# Altium PCB STM32F302VC_EVM.PcbDoc (part 8 of 19)
Units mil, origin at the board's own origin, x right, y up, seen from the top; angles counter-clockwise.
Board outline 3937.01 x 3937.01 mil, 2 copper layers (Top Layer, Bottom Layer); 117 components, 166 nets, 602 pads, 373 vias.
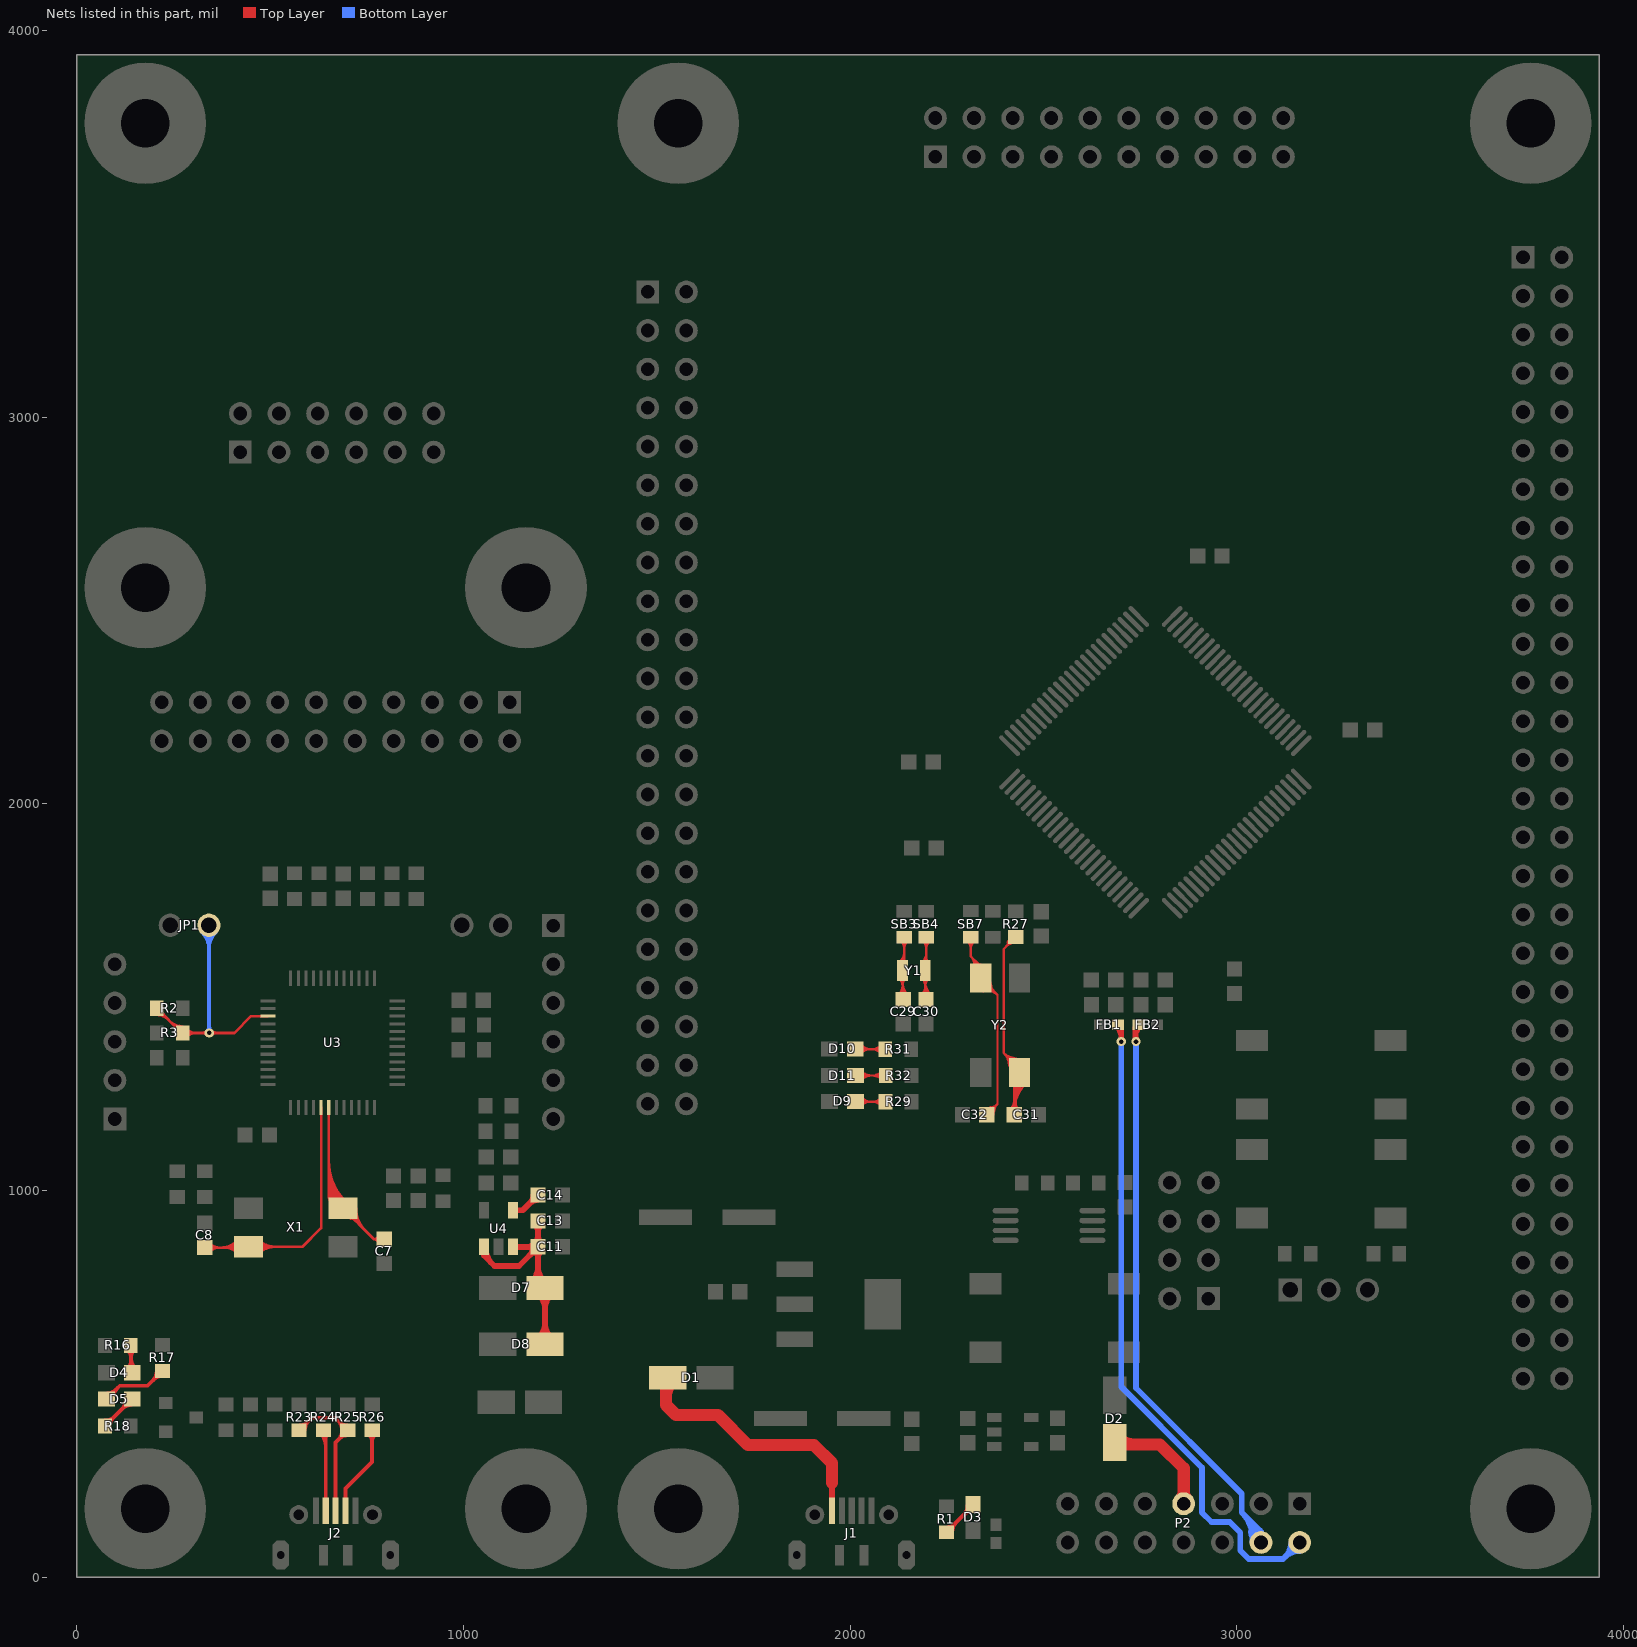
[diagram p8: the nets of this part, all layers, seen from the top]

## Via types
v1: diameter 23.62, hole 11.81, Top Layer to Bottom Layer, tented both sides, 372 vias
v2: diameter 50, hole 28, Top Layer to Bottom Layer, tented both sides, 1 vias

## Nets (pads, with @x,y where several pads share a name; then routed paths per layer and width w, separated by ;. In a path a pad name is that pad's centre, name@x,y a point inside that pad or via, vN(x,y) a via of type N, cw(c..) or ccw(c..) an arc to the next point about the centre after c; other vN are vias at no path point) (continued)
NetC7_1: C7.1 U3.6 X1.3 | length 4002.4
  Top Layer w7: U3.6@651.57,1214.57 651.57,982.28 679.33,954.53 X1.3@687.99,954.53 768.5,874.02 ; C7.1@795.28,874.02 768.5,874.02 ; 651.57,992.27 ccw(c715.89,992.27) X1.3@670.41,946.79 ; 651.57,992.27 ccw(c715.89,992.27) X1.3@670.41,946.79 ; 651.57,992.27 ccw(c715.89,992.27) X1.3@670.41,946.79 ; 651.57,1009.17 ccw(c732.79,1009.17) X1.3@675.36,951.74 ; 651.57,1009.17 ccw(c732.79,1009.17) X1.3@675.36,951.74 ; 651.57,1009.17 ccw(c732.79,1009.17) X1.3@675.36,951.74 ; 651.57,1026.07 ccw(c749.69,1026.07) X1.3@680.31,956.69 ; 651.57,1026.07 ccw(c749.69,1026.07) X1.3@680.31,956.69 ; 651.57,1026.07 ccw(c749.69,1026.07) X1.3@680.31,956.69 ; 651.57,1042.97 ccw(c766.59,1042.97) X1.3@685.26,961.64 ; 651.57,1042.97 ccw(c766.59,1042.97) X1.3@685.26,961.64 ; 651.57,1042.97 ccw(c766.59,1042.97) X1.3@685.26,961.64 ; 651.57,1059.87 ccw(c783.49,1059.87) X1.3@690.21,966.59 ; 651.57,1059.87 ccw(c783.49,1059.87) X1.3@690.21,966.59 ; 651.57,1059.87 ccw(c783.49,1059.87) X1.3@690.21,966.59 ; 651.57,1076.77 ccw(c800.39,1076.77) X1.3@695.16,971.54 ; 651.57,1076.77 ccw(c800.39,1076.77) X1.3@695.16,971.54 ; 651.57,1076.77 ccw(c800.39,1076.77) X1.3@695.16,971.54 ; 651.58,982.28 cw(c638.83,969.53) X1.3@655.67,963.11 ; 651.58,982.28 ccw(c665.24,995.95) X1.3@670.99,977.5 ; 651.58,982.28 ccw(c665.24,995.95) X1.3@670.99,977.5 ; 651.58,982.28 cw(c638.83,969.53) X1.3@655.67,963.11 ; 651.58,982.28 ccw(c665.24,995.95) X1.3@670.99,977.5 ; 651.58,982.28 cw(c638.83,969.53) X1.3@655.67,963.11 ; 653.24,990.05 cw(c625.38,973.96) X1.3@655.57,962.84 ; 653.24,990.05 ccw(c673.5,1001.75) X1.3@675.79,978.47 ; 653.24,990.05 cw(c625.38,973.96) X1.3@655.57,962.84 ; 653.24,990.05 ccw(c673.5,1001.75) X1.3@675.79,978.47 ; 653.24,990.05 ccw(c673.5,1001.75) X1.3@675.79,978.47 ; 653.24,990.05 cw(c625.38,973.96) X1.3@655.57,962.84 ; 655.77,999.2 cw(c625.04,981.45) X1.3@656.69,965.41 ; 655.77,999.2 ccw(c695.11,1021.91) X1.3@684.02,977.86 ; 655.77,999.2 cw(c625.04,981.45) X1.3@656.69,965.41 ; 655.77,999.2 ccw(c695.11,1021.91) X1.3@684.02,977.86 ; 655.77,999.2 ccw(c695.11,1021.91) X1.3@684.02,977.86 ; 655.77,999.2 cw(c625.04,981.45) X1.3@656.69,965.41 ; X1.3@658.67,980.65 ccw(c674.67,989.88) X1.3@676.48,971.5 ; X1.3@658.67,980.65 ccw(c674.67,989.88) X1.3@676.48,971.5 ; X1.3@658.67,980.65 ccw(c674.67,989.88) X1.3@676.48,971.5 ; X1.3@659.21,974.64 cw(c649.88,965.31) X1.3@662.21,960.61 ; X1.3@659.21,974.64 cw(c649.88,965.31) X1.3@662.21,960.61 ; X1.3@659.21,974.64 cw(c649.88,965.31) X1.3@662.21,960.61 ; X1.3@659.98,970.3 ccw(c642.93,985.11) 661.83,997.47 ; X1.3@659.98,970.3 ccw(c642.93,985.11) 661.83,997.47 ; X1.3@659.98,970.3 ccw(c642.93,985.11) 661.83,997.47 ; X1.3@660.71,977.12 cw(c643.62,967.24) X1.3@662.14,960.42 ; X1.3@660.71,977.12 cw(c643.62,967.24) X1.3@662.14,960.42 ; X1.3@660.71,977.12 cw(c643.62,967.24) X1.3@662.14,960.42 ; 662.23,988 cw(c638.8,974.48) X1.3@662.93,962.24 ; 662.23,988 cw(c638.8,974.48) X1.3@662.93,962.24 ; 662.23,988 cw(c638.8,974.48) X1.3@662.93,962.24 ; 664.04,984.87 ccw(c689.48,999.56) X1.3@682.31,971.07 ; 664.04,984.87 ccw(c689.48,999.56) X1.3@682.31,971.07 ; 664.04,984.87 ccw(c689.48,999.56) X1.3@682.31,971.07 ; X1.3@665.27,965.71 ccw(c650.21,978.8) 666.9,989.72 ; X1.3@665.27,965.71 ccw(c650.21,978.8) 666.9,989.72 ; X1.3@665.27,965.71 ccw(c650.21,978.8) 666.9,989.72 ; 667.61,988.64 ccw(c688.09,1002.03) X1.3@683.08,978.08 ; 667.61,988.64 ccw(c688.09,1002.03) X1.3@683.08,978.08 ; 667.61,988.64 ccw(c688.09,1002.03) X1.3@683.08,978.08 ; X1.3@670.55,961.12 ccw(c657.48,972.48) X1.3@671.97,981.96 ; X1.3@670.55,961.12 ccw(c657.48,972.48) X1.3@671.97,981.96 ; X1.3@670.55,961.12 ccw(c657.48,972.48) X1.3@671.97,981.96 ; X1.3@686.9,954.09 ccw(c715.31,955.22) X1.3@707.95,927.76 ; X1.3@686.9,954.09 ccw(c715.31,955.22) X1.3@707.95,927.76 ; X1.3@686.9,954.09 ccw(c715.31,955.22) X1.3@707.95,927.76 ; X1.3@693.9,954.37 ccw(c725.26,955.62) 717.14,925.3 ; X1.3@693.9,954.37 ccw(c725.26,955.62) 717.14,925.3 ; X1.3@693.9,954.37 ccw(c725.26,955.62) 717.14,925.3 ; X1.3@697.18,951.54 cw(c690.13,919.25) X1.3@722.05,927.8 ; X1.3@697.18,951.54 cw(c690.13,919.25) X1.3@722.05,927.8 ; X1.3@697.18,951.54 cw(c690.13,919.25) X1.3@722.05,927.8 ; X1.3@697.83,930.47 cw(c697.83,896.15) 722.1,920.42 ; X1.3@697.83,930.47 cw(c697.83,896.15) 722.1,920.42 ; X1.3@697.83,930.47 cw(c697.83,896.15) 722.1,920.42 ; X1.3@707.89,954.53 ccw(c755.94,954.53) 721.97,920.55 ; X1.3@707.89,954.53 ccw(c755.94,954.53) 721.97,920.55 ; X1.3@707.89,954.53 ccw(c755.94,954.53) 721.97,920.55 ; X1.3@714.89,954.53 ccw(c779.84,954.53) 733.92,908.6 ; X1.3@714.89,954.53 ccw(c779.84,954.53) 733.92,908.6 ; X1.3@714.89,954.53 ccw(c779.84,954.53) 733.92,908.6 ; X1.3@721.89,954.53 ccw(c803.74,954.53) 745.87,896.65 ; X1.3@721.89,954.53 ccw(c803.74,954.53) 745.87,896.65 ; X1.3@721.89,954.53 ccw(c803.74,954.53) 745.87,896.65 ; 768.51,874.02 cw(c768.51,859.97) C7.1@780.94,866.5 ; 768.51,874.02 ccw(c768.51,888.06) C7.1@780.94,881.54 ; 768.51,874.02 ccw(c768.51,888.06) C7.1@780.94,881.54 ; 768.51,874.02 cw(c768.51,859.97) C7.1@780.94,866.5 ; 768.51,874.02 ccw(c768.51,888.06) C7.1@780.94,881.54 ; 768.51,874.02 cw(c768.51,859.97) C7.1@780.94,866.5
NetC8_1: C8.1 U3.5 X1.1 | length 1932.8
  Top Layer w7: C8.1@330.71,852.36 441.73,852.36 X1.1@443.9,854.53 583.86,854.53 631.89,902.56 U3.5@631.89,1214.57 ; C8.1@337.2,845.87 cw(c352.88,830.19) 352.88,852.36 ; C8.1@337.2,845.87 cw(c352.88,830.19) 352.88,852.36 ; C8.1@337.2,845.87 cw(c352.88,830.19) 352.88,852.36 ; C8.1@337.2,858.86 ccw(c352.88,874.54) 352.88,852.36 ; C8.1@337.2,858.86 ccw(c352.88,874.54) 352.88,852.36 ; C8.1@337.2,858.86 ccw(c352.88,874.54) 352.88,852.36 ; C8.1@342.15,840.92 cw(c369.78,813.29) 369.78,852.36 ; C8.1@342.15,840.92 cw(c369.78,813.29) 369.78,852.36 ; C8.1@342.15,840.92 cw(c369.78,813.29) 369.78,852.36 ; C8.1@342.15,863.81 ccw(c369.78,891.44) 369.78,852.36 ; C8.1@342.15,863.81 ccw(c369.78,891.44) 369.78,852.36 ; C8.1@342.15,863.81 ccw(c369.78,891.44) 369.78,852.36 ; 370.74,852.36 ccw(c370.74,917.84) X1.1@417.04,871.54 ; 370.74,852.36 ccw(c370.74,917.84) X1.1@417.04,871.54 ; 370.74,852.36 ccw(c370.74,917.84) X1.1@417.04,871.54 ; 381.2,852.36 cw(c381.2,801.67) X1.1@417.04,837.52 ; 381.2,852.36 cw(c381.2,801.67) X1.1@417.04,837.52 ; 381.2,852.36 cw(c381.2,801.67) X1.1@417.04,837.52 ; 387.64,852.36 ccw(c387.64,900.94) X1.1@421.99,866.59 ; 387.64,852.36 ccw(c387.64,900.94) X1.1@421.99,866.59 ; 387.64,852.36 ccw(c387.64,900.94) X1.1@421.99,866.59 ; 398.1,852.36 cw(c398.1,818.57) X1.1@421.99,842.47 ; 398.1,852.36 cw(c398.1,818.57) X1.1@421.99,842.47 ; 398.1,852.36 cw(c398.1,818.57) X1.1@421.99,842.47 ; 404.54,852.36 ccw(c404.54,884.04) X1.1@426.94,861.64 ; 404.54,852.36 ccw(c404.54,884.04) X1.1@426.94,861.64 ; 404.54,852.36 ccw(c404.54,884.04) X1.1@426.94,861.64 ; X1.1@465.8,842.47 cw(c494.92,813.34) 494.92,854.53 ; X1.1@465.8,842.47 cw(c494.92,813.34) 494.92,854.53 ; X1.1@465.8,842.47 cw(c494.92,813.34) 494.92,854.53 ; X1.1@465.8,866.59 ccw(c494.92,895.71) 494.92,854.53 ; X1.1@465.8,866.59 ccw(c494.92,895.71) 494.92,854.53 ; X1.1@465.8,866.59 ccw(c494.92,895.71) 494.92,854.53 ; X1.1@470.75,837.52 cw(c511.82,796.44) 511.82,854.53 ; X1.1@470.75,837.52 cw(c511.82,796.44) 511.82,854.53 ; X1.1@470.75,837.52 cw(c511.82,796.44) 511.82,854.53 ; X1.1@470.75,871.54 ccw(c511.82,912.61) 511.82,854.53 ; X1.1@470.75,871.54 ccw(c511.82,912.61) 511.82,854.53 ; X1.1@470.75,871.54 ccw(c511.82,912.61) 511.82,854.53
NetC11_2: C11.2 C13.2 D7.1 D8.1 U4.1 U4.3 | length 2257.7
  Top Layer w15: U4.1@1053.15,854.33 1053.15,831.81 1079.84,805.12 1143.7,805.12 C11.2@1192.91,854.33 ; U4.1@1058.19,843.85 ccw(c1071.36,839.6) 1061.57,829.82 ; U4.3@1127.95,854.33 C11.2@1192.91,854.33 ; C13.2@1192.91,921.26 C11.2@1192.91,854.33 ; D8.1@1210.63,602.36 D7.1@1210.63,748.03 1192.91,765.75 C11.2@1192.91,854.33 ; U4.1@1050.5,840.89 cw(c1035.38,814.69) 1064.59,822.52 ; U4.1@1050.5,840.89 cw(c1035.38,814.69) 1064.59,822.52 ; U4.1@1050.5,840.89 cw(c1035.38,814.69) 1064.59,822.52 ; U4.1@1058.44,845.47 ccw(c1104.21,845.47) 1071.85,813.11 ; U4.1@1058.44,845.47 ccw(c1104.21,845.47) 1071.85,813.11 ; U4.1@1058.44,845.47 ccw(c1104.21,845.47) 1071.85,813.11 ; 1163.5,854.33 cw(c1163.5,824.91) C11.2@1184.3,845.71 ; 1163.5,854.33 ccw(c1163.5,883.75) C11.2@1184.3,862.95 ; 1163.5,854.33 ccw(c1163.5,883.75) C11.2@1184.3,862.95 ; 1163.5,854.33 cw(c1163.5,824.91) C11.2@1184.3,845.71 ; 1163.5,854.33 ccw(c1163.5,883.75) C11.2@1184.3,862.95 ; 1163.5,854.33 cw(c1163.5,824.91) C11.2@1184.3,845.71 ; 1172.11,833.53 cw(c1192.91,812.73) C11.2@1192.91,842.15 ; 1172.11,833.53 ccw(c1151.31,854.33) C11.2@1180.73,854.33 ; 1172.11,833.53 ccw(c1151.31,854.33) C11.2@1180.73,854.33 ; 1172.11,833.53 cw(c1192.91,812.73) C11.2@1192.91,842.15 ; 1172.11,833.53 ccw(c1151.31,854.33) C11.2@1180.73,854.33 ; 1172.11,833.53 cw(c1192.91,812.73) C11.2@1192.91,842.15 ; D7.1@1176.64,764.3 ccw(c1137.36,803.59) 1192.91,803.59 ; D7.1@1176.64,764.3 ccw(c1137.36,803.59) 1192.91,803.59 ; D7.1@1176.64,764.3 ccw(c1137.36,803.59) 1192.91,803.59 ; C11.2@1184.3,845.71 cw(c1163.5,824.91) 1192.91,824.91 ; C11.2@1184.3,845.71 cw(c1163.5,824.91) 1192.91,824.91 ; C11.2@1184.3,845.71 cw(c1163.5,824.91) 1192.91,824.91 ; C11.2@1184.3,862.95 ccw(c1163.5,883.75) 1192.91,883.75 ; C11.2@1184.3,862.95 ccw(c1163.5,883.75) 1192.91,883.75 ; C11.2@1184.3,862.95 ccw(c1163.5,883.75) 1192.91,883.75 ; C13.2@1184.3,912.64 cw(c1163.5,891.84) 1192.91,891.84 ; C13.2@1184.3,912.64 cw(c1163.5,891.84) 1192.91,891.84 ; C13.2@1184.3,912.64 cw(c1163.5,891.84) 1192.91,891.84 ; 1192.91,803.59 ccw(c1248.47,803.59) D7.1@1209.19,764.3 ; 1192.91,803.59 ccw(c1248.47,803.59) D7.1@1209.19,764.3 ; 1192.91,803.59 ccw(c1248.47,803.59) D7.1@1209.19,764.3 ; 1192.91,824.91 cw(c1222.33,824.91) C11.2@1201.53,845.71 ; 1192.91,824.91 cw(c1222.33,824.91) C11.2@1201.53,845.71 ; 1192.91,824.91 cw(c1222.33,824.91) C11.2@1201.53,845.71 ; 1192.91,883.75 ccw(c1222.33,883.75) C11.2@1201.53,862.95 ; 1192.91,883.75 ccw(c1222.33,883.75) C11.2@1201.53,862.95 ; 1192.91,883.75 ccw(c1222.33,883.75) C11.2@1201.53,862.95 ; 1192.91,891.84 cw(c1222.33,891.84) C13.2@1201.53,912.64 ; 1192.91,891.84 cw(c1222.33,891.84) C13.2@1201.53,912.64 ; 1192.91,891.84 cw(c1222.33,891.84) C13.2@1201.53,912.64 ; D8.1@1194.36,618.63 ccw(c1155.07,657.92) 1210.63,657.92 ; D8.1@1194.36,618.63 ccw(c1155.07,657.92) 1210.63,657.92 ; D8.1@1194.36,618.63 ccw(c1155.07,657.92) 1210.63,657.92 ; D7.1@1194.36,731.76 cw(c1155.07,692.48) 1210.63,692.48 ; D7.1@1194.36,731.76 cw(c1155.07,692.48) 1210.63,692.48 ; D7.1@1194.36,731.76 cw(c1155.07,692.48) 1210.63,692.48 ; 1210.63,657.92 ccw(c1266.19,657.92) D8.1@1226.9,618.63 ; 1210.63,657.92 ccw(c1266.19,657.92) D8.1@1226.9,618.63 ; 1210.63,657.92 ccw(c1266.19,657.92) D8.1@1226.9,618.63 ; 1210.63,692.48 cw(c1266.19,692.48) D7.1@1226.9,731.76 ; 1210.63,692.48 cw(c1266.19,692.48) D7.1@1226.9,731.76 ; 1210.63,692.48 cw(c1266.19,692.48) D7.1@1226.9,731.76
NetC14_2: C14.2 U4.4 | length 219.9
  Top Layer w15: U4.4@1127.95,948.82 1153.54,948.82 C14.2@1192.91,988.19 ; 1172.11,967.39 cw(c1192.91,946.59) C14.2@1192.91,976 ; 1172.11,967.39 ccw(c1151.31,988.19) C14.2@1180.73,988.19 ; 1172.11,967.39 ccw(c1151.31,988.19) C14.2@1180.73,988.19 ; 1172.11,967.39 cw(c1192.91,946.59) C14.2@1192.91,976 ; 1172.11,967.39 ccw(c1151.31,988.19) C14.2@1180.73,988.19 ; 1172.11,967.39 cw(c1192.91,946.59) C14.2@1192.91,976
NetC29_2: C29.2 SB3.1 Y1.2 | length 1011.8
  Top Layer w6: C29.2@2137.17,1494.09 2135.2,1496.06 Y1.2@2135.2,1568.9 2139.76,1573.46 SB3.1@2139.76,1655.09 ; C29.2@2125.37,1505.89 ccw(c2101.64,1529.62) 2135.2,1529.62 ; C29.2@2125.37,1505.89 ccw(c2101.64,1529.62) 2135.2,1529.62 ; C29.2@2125.37,1505.89 ccw(c2101.64,1529.62) 2135.2,1529.62 ; Y1.2@2127.57,1547.5 cw(c2109.17,1529.09) 2135.2,1529.09 ; Y1.2@2127.57,1547.5 cw(c2109.17,1529.09) 2135.2,1529.09 ; Y1.2@2127.57,1547.5 cw(c2109.17,1529.09) 2135.2,1529.09 ; Y1.2@2127.57,1590.3 ccw(c2098.15,1619.73) 2139.76,1619.73 ; Y1.2@2127.57,1590.3 ccw(c2098.15,1619.73) 2139.76,1619.73 ; Y1.2@2127.57,1590.3 ccw(c2098.15,1619.73) 2139.76,1619.73 ; C29.2@2129.61,1501.65 ccw(c2116.12,1515.14) 2135.2,1515.14 ; C29.2@2129.61,1501.65 ccw(c2116.12,1515.14) 2135.2,1515.14 ; C29.2@2129.61,1501.65 ccw(c2116.12,1515.14) 2135.2,1515.14 ; SB3.1@2130.57,1645.9 cw(c2108.38,1623.7) 2139.76,1623.7 ; SB3.1@2130.57,1645.9 cw(c2108.38,1623.7) 2139.76,1623.7 ; SB3.1@2130.57,1645.9 cw(c2108.38,1623.7) 2139.76,1623.7 ; Y1.2@2131.82,1586.06 ccw(c2112.63,1605.24) 2139.76,1605.24 ; Y1.2@2131.82,1586.06 ccw(c2112.63,1605.24) 2139.76,1605.24 ; Y1.2@2131.82,1586.06 ccw(c2112.63,1605.24) 2139.76,1605.24 ; SB3.1@2134.81,1650.14 cw(c2122.86,1638.19) 2139.76,1638.19 ; SB3.1@2134.81,1650.14 cw(c2122.86,1638.19) 2139.76,1638.19 ; SB3.1@2134.81,1650.14 cw(c2122.86,1638.19) 2139.76,1638.19 ; 2135.2,1524.64 ccw(c2167.71,1524.64) C29.2@2144.72,1501.65 ; 2135.2,1524.64 ccw(c2167.71,1524.64) C29.2@2144.72,1501.65 ; 2135.2,1524.64 ccw(c2167.71,1524.64) C29.2@2144.72,1501.65 ; 2135.2,1529.09 cw(c2161.22,1529.09) Y1.2@2142.82,1547.5 ; 2135.2,1529.09 cw(c2161.22,1529.09) Y1.2@2142.82,1547.5 ; 2135.2,1529.09 cw(c2161.22,1529.09) Y1.2@2142.82,1547.5 ; 2135.2,1539.13 ccw(c2182.2,1539.13) C29.2@2148.96,1505.89 ; 2135.2,1539.13 ccw(c2182.2,1539.13) C29.2@2148.96,1505.89 ; 2135.2,1539.13 ccw(c2182.2,1539.13) C29.2@2148.96,1505.89 ; 2139.76,1597.68 ccw(c2150.2,1597.68) Y1.2@2142.82,1590.3 ; 2139.76,1597.68 ccw(c2150.2,1597.68) Y1.2@2142.82,1590.3 ; 2139.76,1597.68 ccw(c2150.2,1597.68) Y1.2@2142.82,1590.3 ; 2139.76,1623.7 cw(c2171.15,1623.7) SB3.1@2148.96,1645.9 ; 2139.76,1623.7 cw(c2171.15,1623.7) SB3.1@2148.96,1645.9 ; 2139.76,1623.7 cw(c2171.15,1623.7) SB3.1@2148.96,1645.9 ; 2139.76,1638.19 cw(c2156.66,1638.19) SB3.1@2144.71,1650.14 ; 2139.76,1638.19 cw(c2156.66,1638.19) SB3.1@2144.71,1650.14 ; 2139.76,1638.19 cw(c2156.66,1638.19) SB3.1@2144.71,1650.14
NetC30_2: C30.2 SB4.1 Y1.1 | length 995.2
  Top Layer w6: C30.2@2196.22,1494.09 2194.25,1496.06 Y1.1@2194.25,1568.9 2196.85,1571.5 SB4.1@2196.85,1655.09 ; C30.2@2184.42,1505.89 ccw(c2160.69,1529.62) 2194.25,1529.62 ; C30.2@2184.42,1505.89 ccw(c2160.69,1529.62) 2194.25,1529.62 ; C30.2@2184.42,1505.89 ccw(c2160.69,1529.62) 2194.25,1529.62 ; Y1.1@2186.63,1547.5 cw(c2168.23,1529.09) 2194.25,1529.09 ; Y1.1@2186.63,1547.5 cw(c2168.23,1529.09) 2194.25,1529.09 ; Y1.1@2186.63,1547.5 cw(c2168.23,1529.09) 2194.25,1529.09 ; Y1.1@2186.63,1590.3 ccw(c2161.96,1614.97) 2196.85,1614.97 ; Y1.1@2186.63,1590.3 ccw(c2161.96,1614.97) 2196.85,1614.97 ; Y1.1@2186.63,1590.3 ccw(c2161.96,1614.97) 2196.85,1614.97 ; SB4.1@2187.66,1645.9 cw(c2165.47,1623.7) 2196.85,1623.7 ; SB4.1@2187.66,1645.9 cw(c2165.47,1623.7) 2196.85,1623.7 ; SB4.1@2187.66,1645.9 cw(c2165.47,1623.7) 2196.85,1623.7 ; C30.2@2188.66,1501.65 ccw(c2175.18,1515.14) 2194.25,1515.14 ; C30.2@2188.66,1501.65 ccw(c2175.18,1515.14) 2194.25,1515.14 ; C30.2@2188.66,1501.65 ccw(c2175.18,1515.14) 2194.25,1515.14 ; Y1.1@2190.87,1586.06 ccw(c2176.44,1600.49) 2196.85,1600.49 ; Y1.1@2190.87,1586.06 ccw(c2176.44,1600.49) 2196.85,1600.49 ; Y1.1@2190.87,1586.06 ccw(c2176.44,1600.49) 2196.85,1600.49 ; SB4.1@2191.9,1650.14 cw(c2179.95,1638.19) 2196.85,1638.19 ; SB4.1@2191.9,1650.14 cw(c2179.95,1638.19) 2196.85,1638.19 ; SB4.1@2191.9,1650.14 cw(c2179.95,1638.19) 2196.85,1638.19 ; 2194.25,1524.64 ccw(c2226.77,1524.64) C30.2@2203.78,1501.65 ; 2194.25,1524.64 ccw(c2226.77,1524.64) C30.2@2203.78,1501.65 ; 2194.25,1524.64 ccw(c2226.77,1524.64) C30.2@2203.78,1501.65 ; 2194.25,1529.09 cw(c2220.28,1529.09) Y1.1@2201.87,1547.5 ; 2194.25,1529.09 cw(c2220.28,1529.09) Y1.1@2201.87,1547.5 ; 2194.25,1529.09 cw(c2220.28,1529.09) Y1.1@2201.87,1547.5 ; 2194.25,1539.13 ccw(c2241.25,1539.13) C30.2@2208.02,1505.89 ; 2194.25,1539.13 ccw(c2241.25,1539.13) C30.2@2208.02,1505.89 ; 2194.25,1539.13 ccw(c2241.25,1539.13) C30.2@2208.02,1505.89 ; 2196.85,1602.43 ccw(c2214,1602.43) Y1.1@2201.87,1590.3 ; 2196.85,1602.43 ccw(c2214,1602.43) Y1.1@2201.87,1590.3 ; 2196.85,1602.43 ccw(c2214,1602.43) Y1.1@2201.87,1590.3 ; 2196.85,1623.7 cw(c2228.23,1623.7) SB4.1@2206.04,1645.9 ; 2196.85,1623.7 cw(c2228.23,1623.7) SB4.1@2206.04,1645.9 ; 2196.85,1623.7 cw(c2228.23,1623.7) SB4.1@2206.04,1645.9 ; 2196.85,1638.19 cw(c2213.75,1638.19) SB4.1@2201.8,1650.14 ; 2196.85,1638.19 cw(c2213.75,1638.19) SB4.1@2201.8,1650.14 ; 2196.85,1638.19 cw(c2213.75,1638.19) SB4.1@2201.8,1650.14
NetC31_2: C31.2 R27.1 Y2.1 | length 4389.7
  Top Layer w6: Y2.1@2411.38,1338.3 ccw(c2441.85,1346.76) Y2.1@2437.87,1315.39 ; Y2.1@2413.79,1329.6 ccw(c2440.62,1337.06) Y2.1@2437.11,1309.44 ; Y2.1@2414.29,1321.96 ccw(c2393.15,1328.37) 2409.8,1342.89 ccw(c2423.2,1354.57) Y2.1@2429.33,1337.89 ; Y2.1@2414.34,1322.11 ccw(c2393.74,1328.5) 2410,1342.67 ccw(c2423.07,1354.07) Y2.1@2429.17,1337.83 ; C31.2@2424.21,1195.87 2424.21,1291.41 Y2.1@2437.8,1304.99 2437.8,1315.3 2396.84,1356.25 ; R27.1@2428.15,1655.51 2396.84,1624.2 2396.84,1356.25 ; 2396.84,1356.25 cw(c2357.22,1316.62) Y2.1@2413.24,1315.38 ; 2396.84,1356.25 ccw(c2437.53,1396.93) Y2.1@2437.72,1339.39 ; 2396.84,1356.25 ccw(c2437.53,1396.93) Y2.1@2437.72,1339.39 ; 2396.84,1356.25 cw(c2357.22,1316.62) Y2.1@2413.24,1315.38 ; 2396.84,1356.25 ccw(c2437.53,1396.93) Y2.1@2437.72,1339.39 ; 2396.84,1356.25 cw(c2357.22,1316.62) Y2.1@2413.24,1315.38 ; 2399.67,1627.03 ccw(c2371.18,1655.51) R27.1@2411.46,1655.51 ; 2399.67,1627.03 ccw(c2371.18,1655.51) R27.1@2411.46,1655.51 ; 2399.67,1627.03 ccw(c2371.18,1655.51) R27.1@2411.46,1655.51 ; 2404.42,1631.78 cw(c2426.18,1610.02) R27.1@2426.18,1640.8 ; 2404.42,1631.78 cw(c2426.18,1610.02) R27.1@2426.18,1640.8 ; 2404.42,1631.78 cw(c2426.18,1610.02) R27.1@2426.18,1640.8 ; 2406.58,1346.54 cw(c2383.33,1325.98) Y2.1@2413.73,1319.76 ; 2406.58,1346.54 ccw(c2425.71,1363.45) Y2.1@2431.87,1338.67 ; 2406.58,1346.54 cw(c2383.33,1325.98) Y2.1@2413.73,1319.76 ; 2406.58,1346.54 ccw(c2425.71,1363.45) Y2.1@2431.87,1338.67 ; 2406.58,1346.54 ccw(c2425.71,1363.45) Y2.1@2431.87,1338.67 ; 2406.58,1346.54 cw(c2383.33,1325.98) Y2.1@2413.73,1319.76 ; 2406.77,1346.32 cw(c2376.65,1316.19) Y2.1@2419.24,1315.25 ; 2406.77,1346.32 cw(c2376.65,1316.19) Y2.1@2419.24,1315.25 ; 2406.77,1346.32 cw(c2376.65,1316.19) Y2.1@2419.24,1315.25 ; 2407.04,1346.05 ccw(c2437.6,1376.6) Y2.1@2437.74,1333.39 ; 2407.04,1346.05 ccw(c2437.6,1376.6) Y2.1@2437.74,1333.39 ; 2407.04,1346.05 ccw(c2437.6,1376.6) Y2.1@2437.74,1333.39 ; 2407.47,1339.01 ccw(c2446.64,1348.57) Y2.1@2436.42,1309.57 ; 2407.47,1339.01 ccw(c2446.64,1348.57) Y2.1@2436.42,1309.57 ; 2407.47,1339.01 ccw(c2446.64,1348.57) Y2.1@2436.42,1309.57 ; 2407.63,1641.21 cw(c2431.4,1634.84) R27.1@2425.38,1658.7 ; 2407.63,1641.21 cw(c2431.4,1634.84) R27.1@2425.38,1658.7 ; 2407.63,1641.21 cw(c2431.4,1634.84) R27.1@2425.38,1658.7 ; 2409.08,1344.79 ccw(c2428.84,1354.33) Y2.1@2433.69,1332.93 ; 2409.08,1344.79 ccw(c2428.84,1354.33) Y2.1@2433.69,1332.93 ; 2409.08,1344.79 ccw(c2428.84,1354.33) Y2.1@2433.69,1332.93 ; 2409.86,1329.22 ccw(c2443.74,1337.5) Y2.1@2434.89,1303.77 ; 2409.86,1329.22 ccw(c2443.74,1337.5) Y2.1@2434.89,1303.77 ; 2409.86,1329.22 ccw(c2443.74,1337.5) Y2.1@2434.89,1303.77 ; 2409.91,1637.27 ccw(c2391.67,1655.51) R27.1@2417.46,1655.51 ; 2409.91,1637.27 ccw(c2391.67,1655.51) R27.1@2417.46,1655.51 ; 2409.91,1637.27 ccw(c2391.67,1655.51) R27.1@2417.46,1655.51 ; 2410.04,1342.62 cw(c2394.18,1328.59) Y2.1@2414.37,1322.22 ; 2410.04,1342.62 ccw(c2423.09,1354.15) Y2.1@2429.19,1337.84 ; 2410.04,1342.62 cw(c2394.18,1328.59) Y2.1@2414.37,1322.22 ; 2410.04,1342.62 ccw(c2423.09,1354.15) Y2.1@2429.19,1337.84 ; 2410.04,1342.62 ccw(c2423.09,1354.15) Y2.1@2429.19,1337.84 ; 2410.04,1342.62 cw(c2394.18,1328.59) Y2.1@2414.37,1322.22 ; Y2.1@2412.36,1338 ccw(c2430.55,1346.78) Y2.1@2435.02,1327.08 ; Y2.1@2412.36,1338 ccw(c2430.55,1346.78) Y2.1@2435.02,1327.08 ; Y2.1@2412.36,1338 ccw(c2430.55,1346.78) Y2.1@2435.02,1327.08 ; C31.2@2412.41,1207.66 ccw(c2383.93,1236.15) 2424.21,1236.15 ; C31.2@2412.41,1207.66 ccw(c2383.93,1236.15) 2424.21,1236.15 ; C31.2@2412.41,1207.66 ccw(c2383.93,1236.15) 2424.21,1236.15 ; 2413.67,1637.44 ccw(c2408.08,1658.31) R27.1@2429.43,1655.01 ; 2413.67,1637.44 ccw(c2408.08,1658.31) R27.1@2429.43,1655.01 ; 2413.67,1637.44 ccw(c2408.08,1658.31) R27.1@2429.43,1655.01 ; Y2.1@2413.94,1334.74 cw(c2400.02,1328.02) Y2.1@2414.61,1322.93 ; Y2.1@2413.94,1334.74 cw(c2400.02,1328.02) Y2.1@2414.61,1322.93 ; Y2.1@2413.94,1334.74 cw(c2400.02,1328.02) Y2.1@2414.61,1322.93 ; R27.1@2414.66,1642.02 cw(c2426.18,1630.5) R27.1@2426.18,1646.8 ; R27.1@2414.66,1642.02 cw(c2426.18,1630.5) R27.1@2426.18,1646.8 ; R27.1@2414.66,1642.02 cw(c2426.18,1630.5) R27.1@2426.18,1646.8 ; C31.2@2415.26,1209.94 ccw(c2400.02,1233.9) 2428.11,1229.8 ; C31.2@2415.26,1209.94 ccw(c2400.02,1233.9) 2428.11,1229.8 ; C31.2@2415.26,1209.94 ccw(c2400.02,1233.9) 2428.11,1229.8 ; C31.2@2415.26,1209.94 ccw(c2400.02,1233.9) 2428.11,1229.8 ; C31.2@2415.26,1209.94 ccw(c2400.02,1233.9) 2428.11,1229.8 ; 2415.37,1345.3 cw(c2405.56,1308.24) Y2.1@2443.13,1315.93 ; 2415.37,1345.3 cw(c2405.56,1308.24) Y2.1@2443.13,1315.93 ; 2415.37,1345.3 cw(c2405.56,1308.24) Y2.1@2443.13,1315.93 ; C31.2@2416.66,1203.42 ccw(c2398.42,1221.66) 2424.21,1221.66 ; C31.2@2416.66,1203.42 ccw(c2398.42,1221.66) 2424.21,1221.66 ; C31.2@2416.66,1203.42 ccw(c2398.42,1221.66) 2424.21,1221.66 ; Y2.1@2416.7,1336.39 cw(c2396.08,1315.76) Y2.1@2425.24,1315.11 ; Y2.1@2416.7,1336.39 cw(c2396.08,1315.76) Y2.1@2425.24,1315.11 ; Y2.1@2416.7,1336.39 cw(c2396.08,1315.76) Y2.1@2425.24,1315.11 ; Y2.1@2417.24,1335.85 ccw(c2437.66,1356.28) Y2.1@2437.75,1327.39 ; Y2.1@2417.24,1335.85 ccw(c2437.66,1356.28) Y2.1@2437.75,1327.39 ; Y2.1@2417.24,1335.85 ccw(c2437.66,1356.28) Y2.1@2437.75,1327.39 ; C31.2@2418.48,1204.88 ccw(c2409.3,1219.31) 2426.22,1216.84 ; C31.2@2418.48,1204.88 ccw(c2409.3,1219.31) 2426.22,1216.84 ; C31.2@2418.48,1204.88 ccw(c2409.3,1219.31) 2426.22,1216.84 ; C31.2@2418.48,1204.88 ccw(c2409.3,1219.31) 2426.22,1216.84 ; C31.2@2418.48,1204.88 ccw(c2409.3,1219.31) 2426.22,1216.84 ; Y2.1@2420.43,1277.78 cw(c2411.3,1268.65) Y2.1@2424.21,1268.65 ; Y2.1@2420.43,1277.78 cw(c2411.3,1268.65) Y2.1@2424.21,1268.65 ; Y2.1@2420.43,1277.78 cw(c2411.3,1268.65) Y2.1@2424.21,1268.65 ; C31.2@2424.21,1203.07 cw(c2529.88,1203.07) Y2.1@2455.16,1277.78 ; C31.2@2424.21,1203.07 cw(c2529.88,1203.07) Y2.1@2455.16,1277.78 ; C31.2@2424.21,1203.07 cw(c2529.88,1203.07) Y2.1@2455.16,1277.78 ; 2424.21,1217.55 cw(c2515.39,1217.55) Y2.1@2450.92,1282.03 ; 2424.21,1217.55 cw(c2515.39,1217.55) Y2.1@2450.92,1282.03 ; 2424.21,1217.55 cw(c2515.39,1217.55) Y2.1@2450.92,1282.03 ; 2424.21,1221.66 ccw(c2450.01,1221.66) C31.2@2431.77,1203.42 ; 2424.21,1221.66 ccw(c2450.01,1221.66) C31.2@2431.77,1203.42 ; 2424.21,1221.66 ccw(c2450.01,1221.66) C31.2@2431.77,1203.42 ; 2424.21,1232.04 cw(c2500.91,1232.04) Y2.1@2446.68,1286.27 ; 2424.21,1232.04 cw(c2500.91,1232.04) Y2.1@2446.68,1286.27 ; 2424.21,1232.04 cw(c2500.91,1232.04) Y2.1@2446.68,1286.27 ; 2424.21,1236.15 ccw(c2464.49,1236.15) C31.2@2436.01,1207.66 ; 2424.21,1236.15 ccw(c2464.49,1236.15) C31.2@2436.01,1207.66 ; 2424.21,1236.15 ccw(c2464.49,1236.15) C31.2@2436.01,1207.66 ; 2424.21,1246.52 cw(c2486.42,1246.52) Y2.1@2442.43,1290.51 ; 2424.21,1246.52 cw(c2486.42,1246.52) Y2.1@2442.43,1290.51 ; 2424.21,1246.52 cw(c2486.42,1246.52) Y2.1@2442.43,1290.51 ; 2424.21,1261.01 cw(c2471.94,1261.01) Y2.1@2438.19,1294.75 ; 2424.21,1261.01 cw(c2471.94,1261.01) Y2.1@2438.19,1294.75 ; 2424.21,1261.01 cw(c2471.94,1261.01) Y2.1@2438.19,1294.75 ; 2424.72,1342.83 cw(c2416.14,1310.4) Y2.1@2449,1317.13 ; 2424.72,1342.83 cw(c2416.14,1310.4) Y2.1@2449,1317.13 ; 2424.72,1342.83 cw(c2416.14,1310.4) Y2.1@2449,1317.13 ; 2426.44,1218.36 ccw(c2443.2,1215.92) C31.2@2431.56,1203.63 ; 2426.44,1218.36 ccw(c2443.2,1215.92) C31.2@2431.56,1203.63 ; 2426.44,1218.36 ccw(c2443.2,1215.92) C31.2@2431.56,1203.63 ; 2426.44,1218.36 ccw(c2443.2,1215.92) C31.2@2431.56,1203.63 ; 2426.44,1218.36 ccw(c2443.2,1215.92) C31.2@2431.56,1203.63 ; 2428.11,1229.8 ccw(c2452.91,1226.18) C31.2@2435.68,1207.98 ; 2428.11,1229.8 ccw(c2452.91,1226.18) C31.2@2435.68,1207.98 ; 2428.11,1229.8 ccw(c2452.91,1226.18) C31.2@2435.68,1207.98 ; 2428.11,1229.8 ccw(c2452.91,1226.18) C31.2@2435.68,1207.98 ; 2428.11,1229.8 ccw(c2452.91,1226.18) C31.2@2435.68,1207.98 ; 2428.16,1265.79 cw(c2436.51,1260.97) Y2.1@2436.87,1270.61 ; 2428.16,1265.79 cw(c2436.51,1260.97) Y2.1@2436.87,1270.61 ; 2428.16,1265.79 cw(c2436.51,1260.97) Y2.1@2436.87,1270.61 ; 2433.3,1263.1 cw(c2448.78,1254.16) Y2.1@2444.15,1271.43 ; 2433.3,1263.1 cw(c2448.78,1254.16) Y2.1@2444.15,1271.43 ; 2433.3,1263.1 cw(c2448.78,1254.16) Y2.1@2444.15,1271.43
NetC32_2: C32.2 SB7.2 Y2.3 | length 2449.6
  Top Layer w6: SB7.2@2312.01,1655.23 2312.01,1605.32 ; C32.2@2353.35,1195.87 2380.91,1223.43 2380.91,1505.98 ; SB7.2@2302.82,1646.03 cw(c2280.62,1623.84) 2312.01,1623.84 ; SB7.2@2302.82,1646.03 cw(c2280.62,1623.84) 2312.01,1623.84 ; SB7.2@2302.82,1646.03 cw(c2280.62,1623.84) 2312.01,1623.84 ; SB7.2@2307.06,1650.28 cw(c2295.11,1638.33) 2312.01,1638.33 ; SB7.2@2307.06,1650.28 cw(c2295.11,1638.33) 2312.01,1638.33 ; SB7.2@2307.06,1650.28 cw(c2295.11,1638.33) 2312.01,1638.33 ; 2312.01,1605.31 cw(c2292.01,1585.31) Y2.3@2316.52,1571.19 ; 2312.01,1605.31 cw(c2292.01,1585.31) Y2.3@2316.52,1571.19 ; 2312.01,1605.31 cw(c2292.01,1585.31) Y2.3@2316.52,1571.19 ; 2312.01,1605.32 2337.8,1579.53 Y2.3@2337.8,1549.09 2380.91,1505.98 ; 2312.01,1623.84 cw(c2343.39,1623.84) SB7.2@2321.2,1646.03 ; 2312.01,1623.84 cw(c2343.39,1623.84) SB7.2@2321.2,1646.03 ; 2312.01,1623.84 cw(c2343.39,1623.84) SB7.2@2321.2,1646.03 ; 2312.01,1638.33 cw(c2328.91,1638.33) SB7.2@2316.96,1650.28 ; 2312.01,1638.33 cw(c2328.91,1638.33) SB7.2@2316.96,1650.28 ; 2312.01,1638.33 cw(c2328.91,1638.33) SB7.2@2316.96,1650.28 ; 2317.54,1599.78 cw(c2299.03,1581.27) Y2.3@2321.71,1568.19 ; 2317.54,1599.78 cw(c2299.03,1581.27) Y2.3@2321.71,1568.19 ; 2317.54,1599.78 cw(c2299.03,1581.27) Y2.3@2321.71,1568.19 ; 2323.08,1594.25 cw(c2306.05,1577.22) Y2.3@2326.91,1565.2 ; 2323.08,1594.25 cw(c2306.05,1577.22) Y2.3@2326.91,1565.2 ; 2323.08,1594.25 cw(c2306.05,1577.22) Y2.3@2326.91,1565.2 ; 2328.61,1588.71 cw(c2313.07,1573.17) Y2.3@2332.11,1562.2 ; 2328.61,1588.71 cw(c2313.07,1573.17) Y2.3@2332.11,1562.2 ; 2328.61,1588.71 cw(c2313.07,1573.17) Y2.3@2332.11,1562.2 ; Y2.3@2331.03,1586.29 ccw(c2337.8,1593.05) Y2.3@2337.8,1583.49 ; Y2.3@2331.03,1586.29 ccw(c2337.8,1593.05) Y2.3@2337.8,1583.49 ; Y2.3@2331.03,1586.29 ccw(c2337.8,1593.05) Y2.3@2337.8,1583.49 ; Y2.3@2338.03,1544.68 cw(c2336.66,1513.13) 2367.16,1521.31 ; Y2.3@2338.03,1544.68 cw(c2336.66,1513.13) 2367.16,1521.31 ; Y2.3@2338.03,1544.68 cw(c2336.66,1513.13) 2367.16,1521.31 ; Y2.3@2338.29,1550.67 cw(c2337.03,1521.7) Y2.3@2365.04,1529.21 ; Y2.3@2338.29,1550.67 cw(c2337.03,1521.7) Y2.3@2365.04,1529.21 ; Y2.3@2338.29,1550.67 cw(c2337.03,1521.7) Y2.3@2365.04,1529.21 ; Y2.3@2341.16,1527.14 cw(c2348.08,1502.24) 2366.36,1520.52 ; Y2.3@2341.16,1527.14 cw(c2348.08,1502.24) 2366.36,1520.52 ; Y2.3@2341.16,1527.14 cw(c2348.08,1502.24) 2366.36,1520.52 ; Y2.3@2342.77,1521.36 cw(c2351.25,1490.86) 2373.63,1513.25 ; Y2.3@2342.77,1521.36 cw(c2351.25,1490.86) 2373.63,1513.25 ; Y2.3@2342.77,1521.36 cw(c2351.25,1490.86) 2373.63,1513.25 ; Y2.3@2344.37,1515.58 cw(c2354.41,1479.49) 2380.9,1505.98 ; Y2.3@2344.37,1515.58 cw(c2354.41,1479.49) 2380.9,1505.98 ; Y2.3@2344.37,1515.58 cw(c2354.41,1479.49) 2380.9,1505.98 ; C32.2@2346.27,1197.7 cw(c2369.49,1191.68) C32.2@2363.83,1215 ; C32.2@2346.27,1197.7 cw(c2369.49,1191.68) C32.2@2363.83,1215 ; C32.2@2346.27,1197.7 cw(c2369.49,1191.68) C32.2@2363.83,1215 ; C32.2@2352.07,1196.2 cw(c2380.5,1188.82) 2373.57,1217.36 ; C32.2@2352.07,1196.2 cw(c2380.5,1188.82) 2373.57,1217.36 ; C32.2@2352.07,1196.2 cw(c2380.5,1188.82) 2373.57,1217.36 ; C32.2@2353.6,1206.55 ccw(c2354.16,1230.35) C32.2@2370.99,1213.51 ; C32.2@2353.6,1206.55 ccw(c2354.16,1230.35) C32.2@2370.99,1213.51 ; C32.2@2353.6,1206.55 ccw(c2354.16,1230.35) C32.2@2370.99,1213.51 ; C32.2@2353.68,1194.59 ccw(c2346.3,1223.02) 2374.84,1216.09 ; C32.2@2353.68,1194.59 ccw(c2346.3,1223.02) 2374.84,1216.09 ; C32.2@2353.68,1194.59 ccw(c2346.3,1223.02) 2374.84,1216.09 ; C32.2@2353.74,1212.55 ccw(c2354.62,1249.71) 2380.9,1223.42 ; C32.2@2353.74,1212.55 ccw(c2354.62,1249.71) 2380.9,1223.42 ; C32.2@2353.74,1212.55 ccw(c2354.62,1249.71) 2380.9,1223.42 ; C32.2@2355.18,1188.79 ccw(c2349.16,1212.01) C32.2@2372.48,1206.35 ; C32.2@2355.18,1188.79 ccw(c2349.16,1212.01) C32.2@2372.48,1206.35 ; C32.2@2355.18,1188.79 ccw(c2349.16,1212.01) C32.2@2372.48,1206.35 ; Y2.3@2356.35,1539.24 ccw(c2377.4,1539.24) Y2.3@2362.52,1524.36 ; Y2.3@2356.35,1539.24 ccw(c2377.4,1539.24) Y2.3@2362.52,1524.36 ; Y2.3@2356.35,1539.24 ccw(c2377.4,1539.24) Y2.3@2362.52,1524.36 ; Y2.3@2362.35,1539.24 ccw(c2397.88,1539.24) 2372.76,1514.12 ; Y2.3@2362.35,1539.24 ccw(c2397.88,1539.24) 2372.76,1514.12 ; Y2.3@2362.35,1539.24 ccw(c2397.88,1539.24) 2372.76,1514.12 ; C32.2@2364.03,1196.12 cw(c2387.83,1196.68) C32.2@2370.99,1213.51 ; C32.2@2364.03,1196.12 cw(c2387.83,1196.68) C32.2@2370.99,1213.51 ; C32.2@2364.03,1196.12 cw(c2387.83,1196.68) C32.2@2370.99,1213.51 ; C32.2@2370.03,1196.26 cw(c2407.19,1197.14) 2380.9,1223.42 ; C32.2@2370.03,1196.26 cw(c2407.19,1197.14) 2380.9,1223.42 ; C32.2@2370.03,1196.26 cw(c2407.19,1197.14) 2380.9,1223.42
NetD1_2: D1.2 J1.1 | length 808.9
  Top Layer w15: J1.1@1952.76,171.75 1952.76,244.09
  Top Layer w31.5: D1.2@1523.62,515.75 1523.62,445.16 1549.49,419.29 1658.25,419.29 1736,341.54 1906.5,341.54 1952.76,295.28 1952.76,244.09 ; 1523.62,468.22 cw(c1576.07,468.22) D1.2@1538.98,505.31 ; 1523.62,468.22 cw(c1576.07,468.22) D1.2@1538.98,505.31 ; 1523.62,468.22 cw(c1576.07,468.22) D1.2@1538.98,505.31
NetD2_2: D2.2 P2.7 | length 576
  Top Layer w31.5: D2.2@2684.06,343.5 2800.64,343.5 2862.4,281.74 P2.7@2862.4,189.96 ; D2.2@2694.49,358.86 ccw(c2731.58,395.95) 2731.58,343.5 ; D2.2@2694.49,358.86 ccw(c2731.58,395.95) 2731.58,343.5 ; D2.2@2694.49,358.86 ccw(c2731.58,395.95) 2731.58,343.5 ; P2.7@2852.66,199.7 ccw(c2829.13,223.23) 2862.4,223.23 ; P2.7@2852.66,199.7 ccw(c2829.13,223.23) 2862.4,223.23 ; P2.7@2852.66,199.7 ccw(c2829.13,223.23) 2862.4,223.23 ; 2862.4,223.23 ccw(c2895.67,223.23) P2.7@2872.15,199.7 ; 2862.4,223.23 ccw(c2895.67,223.23) P2.7@2872.15,199.7 ; 2862.4,223.23 ccw(c2895.67,223.23) P2.7@2872.15,199.7
NetD3_1: D3.1 R1.2 | length 496.7
  Top Layer w10: R1.2@2249.02,116.63 2317.91,185.53 D3.1@2317.91,187.99 ; R1.2@2250.3,119.26 ccw(c2243.54,145.28) 2269.51,138.33 ; R1.2@2250.3,119.26 ccw(c2243.54,145.28) 2269.51,138.33 ; R1.2@2250.3,119.26 ccw(c2243.54,145.28) 2269.51,138.33 ; R1.2@2250.98,129.35 ccw(c2250.98,155.3) 2269.33,136.95 ; R1.2@2250.98,129.35 ccw(c2250.98,155.3) 2269.33,136.95 ; R1.2@2250.98,129.35 ccw(c2250.98,155.3) 2269.33,136.95 ; R1.2@2263.7,116.63 cw(c2299.15,116.63) 2274.08,141.7 ; R1.2@2263.7,116.63 cw(c2299.15,116.63) 2274.08,141.7 ; R1.2@2263.7,116.63 cw(c2299.15,116.63) 2274.08,141.7 ; 2292.5,160.11 ccw(c2266.59,186.02) D3.1@2303.23,186.02 ; 2292.5,160.11 ccw(c2266.59,186.02) D3.1@2303.23,186.02 ; 2292.5,160.11 ccw(c2266.59,186.02) D3.1@2303.23,186.02 ; 2293.68,161.3 cw(c2317.91,137.07) D3.1@2317.91,171.34 ; 2293.68,161.3 cw(c2317.91,137.07) D3.1@2317.91,171.34 ; 2293.68,161.3 cw(c2317.91,137.07) D3.1@2317.91,171.34
NetD4_1: D4.1 R16.1 | length 384.2
  Top Layer w10: R16.1@139.76,599.41 139.76,532.42 D4.1@143.64,528.54 ; R16.1@130.77,588.45 cw(c109.06,566.74) 139.76,566.74 ; R16.1@130.77,588.45 cw(c109.06,566.74) 139.76,566.74 ; R16.1@130.77,588.45 cw(c109.06,566.74) 139.76,566.74 ; D4.1@131.29,538.93 ccw(c110.82,559.4) 139.76,559.4 ; D4.1@131.29,538.93 ccw(c110.82,559.4) 139.76,559.4 ; D4.1@131.29,538.93 ccw(c110.82,559.4) 139.76,559.4 ; 139.76,566.74 cw(c170.46,566.74) R16.1@148.76,588.45 ; 139.76,566.74 cw(c170.46,566.74) R16.1@148.76,588.45 ; 139.76,566.74 cw(c170.46,566.74) R16.1@148.76,588.45 ; 139.76,568.6 ccw(c181.72,568.6) D4.1@152.05,538.93 ; 139.76,568.6 ccw(c181.72,568.6) D4.1@152.05,538.93 ; 139.76,568.6 ccw(c181.72,568.6) D4.1@152.05,538.93
NetD5_1: D5.1 R18.2 | length 483
  Top Layer w10: R18.2@72.83,390.75 142.72,460.63 D5.1@143.64,460.63 ; R18.2@72.83,405.43 ccw(c72.83,440.89) 97.9,415.82 ; R18.2@72.83,405.43 ccw(c72.83,440.89) 97.9,415.82 ; R18.2@72.83,405.43 ccw(c72.83,440.89) 97.9,415.82 ; R18.2@85.55,392.72 cw(c111.5,392.72) 93.15,411.06 ; R18.2@85.55,392.72 cw(c111.5,392.72) 93.15,411.06 ; R18.2@85.55,392.72 cw(c111.5,392.72) 93.15,411.06 ; 115.86,433.77 ccw(c89,460.63) D5.1@126.98,460.63 ; 115.86,433.77 ccw(c89,460.63) D5.1@126.98,460.63 ; 115.86,433.77 ccw(c89,460.63) D5.1@126.98,460.63 ; 118.39,436.3 cw(c141.67,413.02) D5.1@141.67,445.94 ; 118.39,436.3 cw(c141.67,413.02) D5.1@141.67,445.94 ; 118.39,436.3 cw(c141.67,413.02) D5.1@141.67,445.94 ; D5.1@124.15,450.05 cw(c145.42,444.35) D5.1@140.48,465.81 ; D5.1@124.15,450.05 cw(c145.42,444.35) D5.1@140.48,465.81 ; D5.1@124.15,450.05 cw(c145.42,444.35) D5.1@140.48,465.81
NetD5_2: D5.2 R17.1 | length 558.7
  Top Layer w10: D5.2@76.71,460.63 111.16,495.08 183.07,495.08 R17.1@221.46,533.46 ; D5.2@78.68,475.31 ccw(c78.68,506.02) 100.39,484.31 ; D5.2@78.68,475.31 ccw(c78.68,506.02) 100.39,484.31 ; D5.2@78.68,475.31 ccw(c78.68,506.02) 100.39,484.31 ; D5.2@79.98,455.48 ccw(c74.44,477.41) D5.2@96.29,471.55 ; D5.2@79.98,455.48 ccw(c74.44,477.41) D5.2@96.29,471.55 ; D5.2@79.98,455.48 ccw(c74.44,477.41) D5.2@96.29,471.55 ; D5.2@93.36,460.63 cw(c133.57,460.63) 105.14,489.06 ; D5.2@93.36,460.63 cw(c133.57,460.63) 105.14,489.06 ; D5.2@93.36,460.63 cw(c133.57,460.63) 105.14,489.06 ; 196.39,508.4 ccw(c171.32,533.46) R17.1@206.77,533.46 ; 196.39,508.4 ccw(c171.32,533.46) R17.1@206.77,533.46 ; 196.39,508.4 ccw(c171.32,533.46) R17.1@206.77,533.46 ; 201.14,513.15 cw(c219.49,494.8) R17.1@219.49,520.75 ; 201.14,513.15 cw(c219.49,494.8) R17.1@219.49,520.75 ; 201.14,513.15 cw(c219.49,494.8) R17.1@219.49,520.75
NetD9_1: D9.1 R29.2 | length 656.3
  Top Layer w6: D9.1@2013.65,1230.32 2014.64,1229.33 R29.2@2091.54,1229.33 ; D9.1@2023.18,1222.76 cw(c2039.04,1206.9) 2039.04,1229.33 ; D9.1@2023.18,1222.76 cw(c2039.04,1206.9) 2039.04,1229.33 ; D9.1@2023.18,1222.76 cw(c2039.04,1206.9) 2039.04,1229.33 ; D9.1@2023.18,1237.87 ccw(c2043.8,1258.49) 2043.8,1229.33 ; D9.1@2023.18,1237.87 ccw(c2043.8,1258.49) 2043.8,1229.33 ; D9.1@2023.18,1237.87 ccw(c2043.8,1258.49) 2043.8,1229.33 ; D9.1@2027.42,1218.52 cw(c2053.53,1192.41) 2053.53,1229.33 ; D9.1@2027.42,1218.52 cw(c2053.53,1192.41) 2053.53,1229.33 ; D9.1@2027.42,1218.52 cw(c2053.53,1192.41) 2053.53,1229.33 ; D9.1@2027.42,1242.11 ccw(c2058.28,1272.97) 2058.28,1229.33 ; D9.1@2027.42,1242.11 ccw(c2058.28,1272.97) 2058.28,1229.33 ; D9.1@2027.42,1242.11 ccw(c2058.28,1272.97) 2058.28,1229.33 ; 2056.01,1229.33 cw(c2056.01,1193.8) R29.2@2081.13,1218.92 ; 2056.01,1229.33 ccw(c2056.01,1264.86) R29.2@2081.13,1239.74 ; 2056.01,1229.33 ccw(c2056.01,1264.86) R29.2@2081.13,1239.74 ; 2056.01,1229.33 cw(c2056.01,1193.8) R29.2@2081.13,1218.92 ; 2056.01,1229.33 ccw(c2056.01,1264.86) R29.2@2081.13,1239.74 ; 2056.01,1229.33 cw(c2056.01,1193.8) R29.2@2081.13,1218.92 ; 2070.49,1229.33 cw(c2070.49,1208.29) R29.2@2085.37,1223.17 ; 2070.49,1229.33 ccw(c2070.49,1250.37) R29.2@2085.37,1235.49 ; 2070.49,1229.33 ccw(c2070.49,1250.37) R29.2@2085.37,1235.49 ; 2070.49,1229.33 cw(c2070.49,1208.29) R29.2@2085.37,1223.17 ; 2070.49,1229.33 ccw(c2070.49,1250.37) R29.2@2085.37,1235.49 ; 2070.49,1229.33 cw(c2070.49,1208.29) R29.2@2085.37,1223.17
NetD10_1: D10.1 R31.2 | length 656.3
  Top Layer w6: D10.1@2012.8,1366.14 2013.78,1365.16 R31.2@2090.68,1365.16 ; D10.1@2022.32,1358.59 cw(c2038.18,1342.72) 2038.18,1365.16 ; D10.1@2022.32,1358.59 cw(c2038.18,1342.72) 2038.18,1365.16 ; D10.1@2022.32,1358.59 cw(c2038.18,1342.72) 2038.18,1365.16 ; D10.1@2022.32,1373.7 ccw(c2042.94,1394.32) 2042.94,1365.16 ; D10.1@2022.32,1373.7 ccw(c2042.94,1394.32) 2042.94,1365.16 ; D10.1@2022.32,1373.7 ccw(c2042.94,1394.32) 2042.94,1365.16 ; D10.1@2026.56,1354.34 cw(c2052.67,1328.24) 2052.67,1365.16 ; D10.1@2026.56,1354.34 cw(c2052.67,1328.24) 2052.67,1365.16 ; D10.1@2026.56,1354.34 cw(c2052.67,1328.24) 2052.67,1365.16 ; D10.1@2026.56,1377.94 ccw(c2057.42,1408.8) 2057.42,1365.16 ; D10.1@2026.56,1377.94 ccw(c2057.42,1408.8) 2057.42,1365.16 ; D10.1@2026.56,1377.94 ccw(c2057.42,1408.8) 2057.42,1365.16 ; 2055.15,1365.16 cw(c2055.15,1329.63) R31.2@2080.27,1354.75 ; 2055.15,1365.16 ccw(c2055.15,1400.69) R31.2@2080.27,1375.56 ; 2055.15,1365.16 ccw(c2055.15,1400.69) R31.2@2080.27,1375.56 ; 2055.15,1365.16 cw(c2055.15,1329.63) R31.2@2080.27,1354.75 ; 2055.15,1365.16 ccw(c2055.15,1400.69) R31.2@2080.27,1375.56 ; 2055.15,1365.16 cw(c2055.15,1329.63) R31.2@2080.27,1354.75 ; 2069.63,1365.16 cw(c2069.63,1344.11) R31.2@2084.51,1358.99 ; 2069.63,1365.16 ccw(c2069.63,1386.2) R31.2@2084.51,1371.32 ; 2069.63,1365.16 ccw(c2069.63,1386.2) R31.2@2084.51,1371.32 ; 2069.63,1365.16 cw(c2069.63,1344.11) R31.2@2084.51,1358.99 ; 2069.63,1365.16 ccw(c2069.63,1386.2) R31.2@2084.51,1371.32 ; 2069.63,1365.16 cw(c2069.63,1344.11) R31.2@2084.51,1358.99
NetD11_1: D11.1 R32.2 | length 656.2
  Top Layer w6: D11.1@2013.47,1297.24 R32.2@2091.66,1297.24 ; D11.1@2023,1289.69 cw(c2041.24,1271.45) 2041.24,1297.24 ; D11.1@2023,1289.69 cw(c2041.24,1271.45) 2041.24,1297.24 ; D11.1@2023,1289.69 cw(c2041.24,1271.45) 2041.24,1297.24 ; D11.1@2023,1304.8 ccw(c2041.24,1323.04) 2041.24,1297.24 ; D11.1@2023,1304.8 ccw(c2041.24,1323.04) 2041.24,1297.24 ; D11.1@2023,1304.8 ccw(c2041.24,1323.04) 2041.24,1297.24 ; D11.1@2027.24,1285.45 cw(c2055.72,1256.96) 2055.72,1297.24 ; D11.1@2027.24,1285.45 cw(c2055.72,1256.96) 2055.72,1297.24 ; D11.1@2027.24,1285.45 cw(c2055.72,1256.96) 2055.72,1297.24 ; D11.1@2027.24,1309.04 ccw(c2055.72,1337.52) 2055.72,1297.24 ; D11.1@2027.24,1309.04 ccw(c2055.72,1337.52) 2055.72,1297.24 ; D11.1@2027.24,1309.04 ccw(c2055.72,1337.52) 2055.72,1297.24 ; 2056.13,1297.24 cw(c2056.13,1261.72) R32.2@2081.26,1286.84 ; 2056.13,1297.24 ccw(c2056.13,1332.77) R32.2@2081.26,1307.65 ; 2056.13,1297.24 ccw(c2056.13,1332.77) R32.2@2081.26,1307.65 ; 2056.13,1297.24 cw(c2056.13,1261.72) R32.2@2081.26,1286.84 ; 2056.13,1297.24 ccw(c2056.13,1332.77) R32.2@2081.26,1307.65 ; 2056.13,1297.24 cw(c2056.13,1261.72) R32.2@2081.26,1286.84 ; 2070.62,1297.24 cw(c2070.62,1276.2) R32.2@2085.5,1291.08 ; 2070.62,1297.24 ccw(c2070.62,1318.29) R32.2@2085.5,1303.41 ; 2070.62,1297.24 ccw(c2070.62,1318.29) R32.2@2085.5,1303.41 ; 2070.62,1297.24 cw(c2070.62,1276.2) R32.2@2085.5,1291.08 ; 2070.62,1297.24 ccw(c2070.62,1318.29) R32.2@2085.5,1303.41 ; 2070.62,1297.24 cw(c2070.62,1276.2) R32.2@2085.5,1291.08
NetFB1_1: FB1.1 P2.2 | length 2076.9
  Top Layer w15: FB1.1@2692.91,1429.13 2700.91,1421.13 v1(2700.91,1385.04) ; FB1.1@2690.44,1424.69 cw(c2665.16,1399.41) 2700.91,1399.41 ; FB1.1@2690.44,1424.69 cw(c2665.16,1399.41) 2700.91,1399.41 ; FB1.1@2690.44,1424.69 cw(c2665.16,1399.41) 2700.91,1399.41 ; 2697.94,1411.7 cw(c2707.55,1417.25) FB1.1@2699.46,1424.84 ; 2697.94,1411.7 cw(c2707.55,1417.25) FB1.1@2699.46,1424.84 ; 2697.94,1411.7 cw(c2707.55,1417.25) FB1.1@2699.46,1424.84
  Bottom Layer w15: v1@2700.79,1385.04 2700.79,492.52 2909.45,283.86 2909.45,167.32 2934.06,142.72 2981.79,142.72 3008.86,115.65 3008.86,68.9 3030.82,46.93 3119.37,46.93 P2.2@3162.4,89.96 ; 3124.8,52.36 cw(c3162.4,14.75) P2.2@3162.4,67.93 ; 3124.8,52.36 ccw(c3087.19,89.96) P2.2@3140.37,89.96 ; 3124.8,52.36 ccw(c3087.19,89.96) P2.2@3140.37,89.96 ; 3124.8,52.36 cw(c3162.4,14.75) P2.2@3162.4,67.93 ; 3124.8,52.36 ccw(c3087.19,89.96) P2.2@3140.37,89.96 ; 3124.8,52.36 cw(c3162.4,14.75) P2.2@3162.4,67.93
NetFB2_1: FB2.1 P2.4 | length 2362.6
  Top Layer w15: v1@2738.19,1386.02 2738.19,1421.26 FB2.1@2746.06,1429.13 ; 2738.19,1397.82 ccw(c2751.96,1397.82) v1@2742.22,1388.09 ; 2738.19,1397.82 ccw(c2751.96,1397.82) v1@2742.22,1388.09 ; 2738.19,1397.82 ccw(c2751.96,1397.82) v1@2742.22,1388.09 ; 2738.19,1399.72 cw(c2773.51,1399.72) FB2.1@2748.53,1424.69 ; 2738.19,1399.72 cw(c2773.51,1399.72) FB2.1@2748.53,1424.69 ; 2738.19,1399.72 cw(c2773.51,1399.72) FB2.1@2748.53,1424.69 ; FB2.1@2739.57,1424.78 cw(c2731.79,1417.29) 2741.14,1411.89 ; FB2.1@2739.57,1424.78 cw(c2731.79,1417.29) 2741.14,1411.89 ; FB2.1@2739.57,1424.78 cw(c2731.79,1417.29) 2741.14,1411.89
  Bottom Layer w15: v1(2739.17,1385.04) 2739.17,489.37 3012.8,215.75 3012.8,167.32 ; P2.4@3062.4,89.96 3062.4,117.72 3012.8,167.32 ; 3012.8,167.32 cw(c2945.24,99.76) P2.4@3040.45,91.8 ; 3012.8,167.32 cw(c2945.24,99.76) P2.4@3040.45,91.8 ; 3012.8,167.32 cw(c2945.24,99.76) P2.4@3040.45,91.8 ; 3035.66,144.46 cw(c2987.43,96.23) P2.4@3055.4,90.55 ; 3035.66,144.46 cw(c2987.43,96.23) P2.4@3055.4,90.55 ; 3035.66,144.46 cw(c2987.43,96.23) P2.4@3055.4,90.55 ; 3035.76,117.8 ccw(c3088.31,127.27) P2.4@3057.85,83.41 ; 3035.76,117.8 ccw(c3088.31,127.27) P2.4@3057.85,83.41 ; 3035.76,117.8 ccw(c3088.31,127.27) P2.4@3057.85,83.41 ; P2.4@3044.31,102.53 ccw(c3019.67,119.64) 3049.19,124.96 ; P2.4@3044.31,102.53 ccw(c3019.67,119.64) 3049.19,124.96 ; P2.4@3044.31,102.53 ccw(c3019.67,119.64) 3049.19,124.96 ; 3058.52,121.6 cw(c3029.62,92.7) P2.4@3070.35,89.3 ; 3058.52,121.6 cw(c3029.62,92.7) P2.4@3070.35,89.3 ; 3058.52,121.6 cw(c3029.62,92.7) P2.4@3070.35,89.3
NetJ2_2: J2.2 R24.1 | length 358.5
  Top Layer w10: R24.1@637.8,379.92 633.86,375.98 643.7,366.14 J2.2@643.7,171.75 ; R24.1@630.77,370.93 cw(c599.56,339.72) 643.7,339.72 ; R24.1@630.77,370.93 cw(c599.56,339.72) 643.7,339.72 ; R24.1@630.77,370.93 cw(c599.56,339.72) 643.7,339.72 ; 643.7,358.73 cw(c660.96,358.73) R24.1@648.76,370.93 ; 643.7,358.73 cw(c660.96,358.73) R24.1@648.76,370.93 ; 643.7,358.73 cw(c660.96,358.73) R24.1@648.76,370.93
NetJ2_3: J2.3 R23.1 R25.1 | length 893.2
  Top Layer w10: R23.1@574.8,379.92 607.28,412.4 668.31,412.4 R25.1@700.79,379.92 669.29,348.42 J2.3@669.29,171.75 ; R23.1@576.09,382.55 ccw(c569.33,408.57) 595.3,401.61 ; R23.1@576.09,382.55 ccw(c569.33,408.57) 595.3,401.61 ; R23.1@576.09,382.55 ccw(c569.33,408.57) 595.3,401.61 ; R23.1@576.77,392.64 ccw(c576.77,418.59) 595.12,400.24 ; R23.1@576.77,392.64 ccw(c576.77,418.59) 595.12,400.24 ; R23.1@576.77,392.64 ccw(c576.77,418.59) 595.12,400.24 ; R23.1@589.49,379.92 cw(c624.94,379.92) 599.87,404.99 ; R23.1@589.49,379.92 cw(c624.94,379.92) 599.87,404.99 ; R23.1@589.49,379.92 cw(c624.94,379.92) 599.87,404.99 ; 675.72,354.85 ccw(c650.65,379.92) R25.1@686.1,379.92 ; 675.72,354.85 ccw(c650.65,379.92) R25.1@686.1,379.92 ; 675.72,354.85 ccw(c650.65,379.92) R25.1@686.1,379.92 ; 675.72,404.99 cw(c650.65,379.92) R25.1@686.1,379.92 ; 675.72,404.99 cw(c650.65,379.92) R25.1@686.1,379.92 ; 675.72,404.99 cw(c650.65,379.92) R25.1@686.1,379.92 ; 680.47,359.6 cw(c698.82,341.26) R25.1@698.82,367.2 ; 680.47,359.6 cw(c698.82,341.26) R25.1@698.82,367.2 ; 680.47,359.6 cw(c698.82,341.26) R25.1@698.82,367.2 ; 680.47,400.24 ccw(c698.82,418.59) R25.1@698.82,392.64 ; 680.47,400.24 ccw(c698.82,418.59) R25.1@698.82,392.64 ; 680.47,400.24 ccw(c698.82,418.59) R25.1@698.82,392.64
NetJ2_4: J2.4 R26.1 | length 381.4
  Top Layer w10: J2.4@694.88,171.75 694.88,229.33 763.78,298.23 R26.1@763.78,379.92 ; R26.1@754.79,370.93 cw(c733.08,349.22) 763.78,349.22 ; R26.1@754.79,370.93 cw(c733.08,349.22) 763.78,349.22 ; R26.1@754.79,370.93 cw(c733.08,349.22) 763.78,349.22 ; 763.78,349.22 cw(c794.48,349.22) R26.1@772.77,370.93 ; 763.78,349.22 cw(c794.48,349.22) R26.1@772.77,370.93 ; 763.78,349.22 cw(c794.48,349.22) R26.1@772.77,370.93
NetJP1_2: JP1.2 R2.2 R3.1 U3.39 | length 2326.3
  Top Layer w7: R2.2@206.69,1471.46 270.67,1407.48 R3.1@273.62,1407.48 v1(342.52,1407.48) 407.48,1407.48 450.79,1450.79 U3.39@494.09,1450.79 ; R2.2@200.12,1467.82 ccw(c219.86,1472.83) R2.2@214.59,1453.16 ; R2.2@200.12,1467.82 ccw(c219.86,1472.83) R2.2@214.59,1453.16 ; R2.2@200.12,1467.82 ccw(c219.86,1472.83) R2.2@214.59,1453.16 ; R2.2@206.66,1469.27 cw(c203.18,1446.45) 225.48,1452.42 ; R2.2@206.66,1469.27 cw(c203.18,1446.45) 225.48,1452.42 ; R2.2@206.66,1469.27 cw(c203.18,1446.45) 225.48,1452.42 ; R2.2@206.69,1455.27 cw(c206.69,1416.2) 234.32,1443.83 ; R2.2@206.69,1455.27 cw(c206.69,1416.2) 234.32,1443.83 ; R2.2@206.69,1455.27 cw(c206.69,1416.2) 234.32,1443.83 ; R2.2@206.69,1462.27 cw(c206.69,1440.1) R2.2@222.37,1455.78 ; R2.2@206.69,1462.27 cw(c206.69,1440.1) R2.2@222.37,1455.78 ; R2.2@206.69,1462.27 cw(c206.69,1440.1) R2.2@222.37,1455.78 ; R2.2@206.9,1469.54 ccw(c233.13,1476.21) 226.13,1450.06 ; R2.2@206.9,1469.54 ccw(c233.13,1476.21) 226.13,1450.06 ; R2.2@206.9,1469.54 ccw(c233.13,1476.21) 226.13,1450.06 ; R2.2@220.91,1469.49 ccw(c250.48,1469.49) 229.57,1448.58 ; R2.2@220.91,1469.49 ccw(c250.48,1469.49) 229.57,1448.58 ; R2.2@220.91,1469.49 ccw(c250.48,1469.49) 229.57,1448.58 ; 240.95,1437.2 ccw(c273.62,1469.87) R3.1@273.62,1423.67 ; 240.95,1437.2 ccw(c273.62,1469.87) R3.1@273.62,1423.67 ; 240.95,1437.2 ccw(c273.62,1469.87) R3.1@273.62,1423.67 ; 252.41,1429.35 cw(c244.56,1400.06) R3.1@273.42,1409.38 ; 252.41,1429.35 cw(c244.56,1400.06) R3.1@273.42,1409.38 ; 252.41,1429.35 cw(c244.56,1400.06) R3.1@273.42,1409.38 ; 252.83,1425.32 cw(c236.96,1409.45) R3.1@259.41,1409.45 ; 252.83,1425.32 cw(c236.96,1409.45) R3.1@259.41,1409.45 ; 252.83,1425.32 cw(c236.96,1409.45) R3.1@259.41,1409.45 ; 252.9,1425.25 ccw(c273.62,1445.97) R3.1@273.62,1416.67 ; 252.9,1425.25 ccw(c273.62,1445.97) R3.1@273.62,1416.67 ; 252.9,1425.25 ccw(c273.62,1445.97) R3.1@273.62,1416.67 ; R3.1@264.84,1426.02 cw(c259.14,1404.77) R3.1@280.08,1411.53 ; R3.1@264.84,1426.02 cw(c259.14,1404.77) R3.1@280.08,1411.53 ; R3.1@264.84,1426.02 cw(c259.14,1404.77) R3.1@280.08,1411.53 ; R3.1@283.67,1397.43 cw(c307.94,1373.16) 307.94,1407.48 ; R3.1@283.67,1397.43 cw(c307.94,1373.16) 307.94,1407.48 ; R3.1@283.67,1397.43 cw(c307.94,1373.16) 307.94,1407.48 ; R3.1@283.67,1417.53 ccw(c307.94,1441.8) 307.94,1407.48 ; R3.1@283.67,1417.53 ccw(c307.94,1441.8) 307.94,1407.48 ; R3.1@283.67,1417.53 ccw(c307.94,1441.8) 307.94,1407.48 ; 322.46,1407.48 cw(c322.46,1387.42) v1@336.64,1401.6 ; 322.46,1407.48 ccw(c322.46,1427.54) v1@336.64,1413.36 ; 322.46,1407.48 ccw(c322.46,1427.54) v1@336.64,1413.36 ; 322.46,1407.48 cw(c322.46,1387.42) v1@336.64,1401.6 ; 322.46,1407.48 ccw(c322.46,1427.54) v1@336.64,1413.36 ; 322.46,1407.48 cw(c322.46,1387.42) v1@336.64,1401.6 ; v1@348.4,1401.6 cw(c362.58,1387.42) 362.58,1407.48 ; v1@348.4,1401.6 cw(c362.58,1387.42) 362.58,1407.48 ; v1@348.4,1401.6 cw(c362.58,1387.42) 362.58,1407.48 ; v1@348.4,1413.36 ccw(c362.58,1427.54) 362.58,1407.48 ; v1@348.4,1413.36 ccw(c362.58,1427.54) 362.58,1407.48 ; v1@348.4,1413.36 ccw(c362.58,1427.54) 362.58,1407.48
  Bottom Layer w10: JP1.2@341.76,1686.02 341.76,1408.24 v1(342.52,1407.48) ; JP1.2@324.08,1668.34 cw(c281.41,1625.66) 341.76,1625.66 ; JP1.2@324.08,1668.34 cw(c281.41,1625.66) 341.76,1625.66 ; JP1.2@324.08,1668.34 cw(c281.41,1625.66) 341.76,1625.66 ; JP1.2@331.15,1675.41 cw(c305.55,1649.8) 341.76,1649.8 ; JP1.2@331.15,1675.41 cw(c305.55,1649.8) 341.76,1649.8 ; JP1.2@331.15,1675.41 cw(c305.55,1649.8) 341.76,1649.8 ; v1@337.7,1412.3 ccw(c327.91,1422.09) 341.76,1422.09 ; v1@337.7,1412.3 ccw(c327.91,1422.09) 341.76,1422.09 ; v1@337.7,1412.3 ccw(c327.91,1422.09) 341.76,1422.09 ; 341.76,1425.75 ccw(c360.79,1425.75) v1@347.34,1412.3 ; 341.76,1425.75 ccw(c360.79,1425.75) v1@347.34,1412.3 ; 341.76,1425.75 ccw(c360.79,1425.75) v1@347.34,1412.3 ; 341.76,1625.66 cw(c402.12,1625.66) JP1.2@359.44,1668.34 ; 341.76,1625.66 cw(c402.12,1625.66) JP1.2@359.44,1668.34 ; 341.76,1625.66 cw(c402.12,1625.66) JP1.2@359.44,1668.34 ; 341.76,1649.8 cw(c377.97,1649.8) JP1.2@352.37,1675.41 ; 341.76,1649.8 cw(c377.97,1649.8) JP1.2@352.37,1675.41 ; 341.76,1649.8 cw(c377.97,1649.8) JP1.2@352.37,1675.41